# Altium PCB Power_Board_2.PcbDoc
Units mil, origin at the board's own origin, x right, y up, seen from the top; angles counter-clockwise.
Board outline 6295 x 3940 mil, 2 copper layers (Top Layer, Bottom Layer), stack 61.756 mil thick; 49 components, 183 nets, 278 pads, 4 vias.
Unrouted connection lines stored in the file: 76.
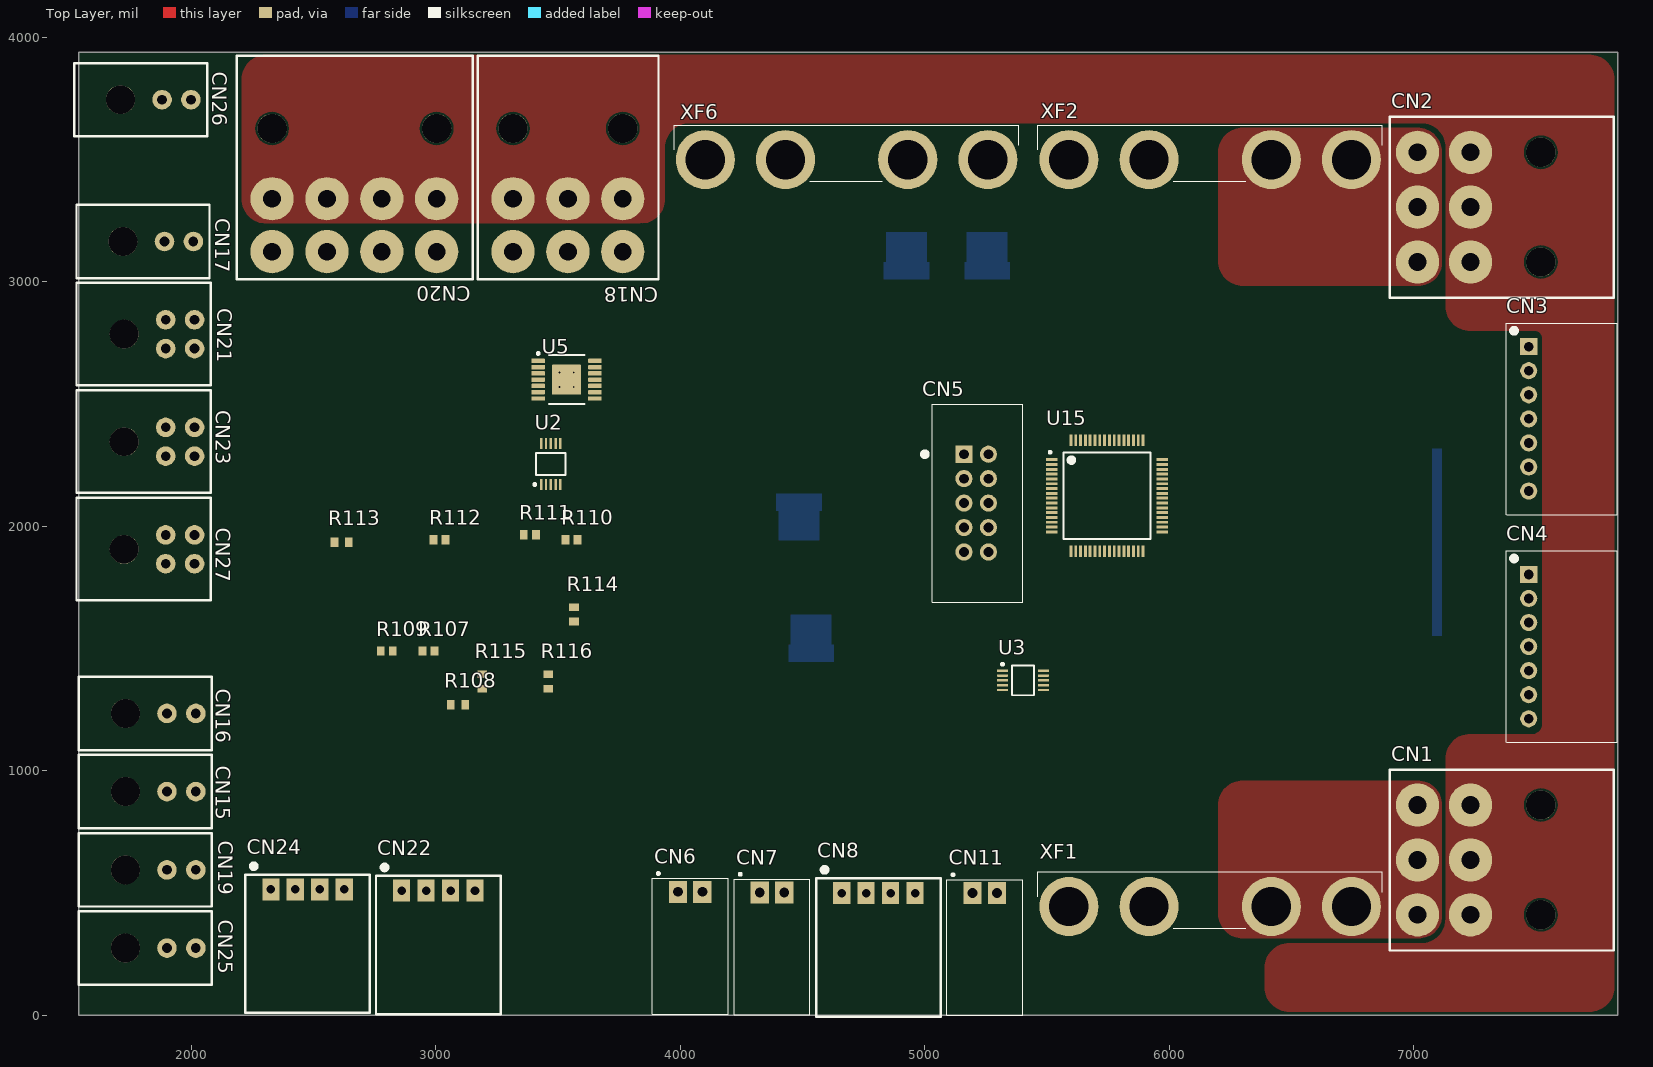
[diagram p0: Top Layer view]
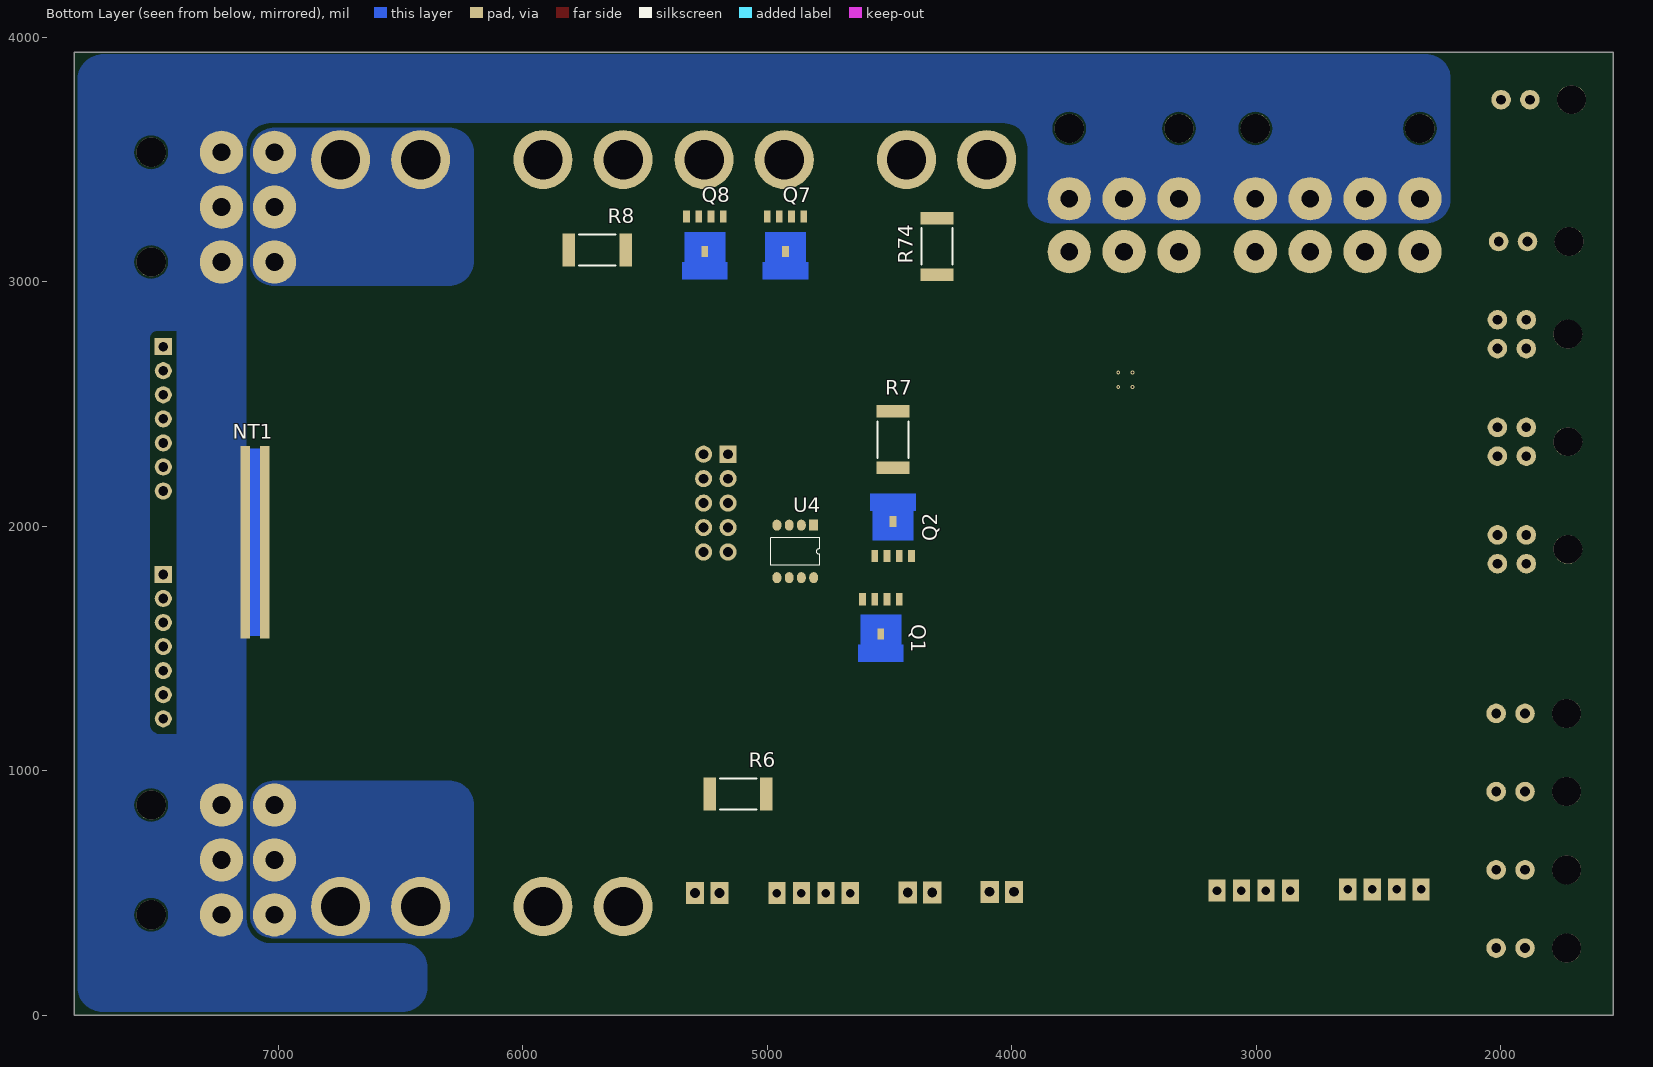
[diagram p1: Bottom Layer view, seen from below]

## Layer stack, top to bottom
Top Solder: solder mask 1, SM-001, Dk 4
Top Layer: signal copper 1.378
Dielectric 1: core 59, Core-043, Dk 4.3
Bottom Layer: signal copper 1.378
Bottom Solder: solder mask 1, SM-001, Dk 4

## Board outline
1540,0 7835,0 7835,3940 1540,3940

## Design rules (kind name [scope] priority, off if disabled: settings)
Clearance [All] p1: gap=8 ignorepadtopadclearanceinfootprint=TRUE
DiffPairsRouting [All] p1: maxlimit=10 minlimit=8 mostfreqgap=8 toplayer_minwidth=8 toplayer_maxwidth=15 toplayer_prefwidth=10 bottomlayer_minwidth=8 bottomlayer_maxwidth=15 bottomlayer_prefwidth=10 maxuncoupledlength=500
PolygonConnect Batt_30A [All vs IsNamedPolygon('Batt_30A')] p1: connectstyle=Direct reliefconductorwidth=10 reliefentries=4 polygonreliefangle="90 Angle" airgapwidth=10
PolygonConnect [All] p2: connectstyle=Relief reliefconductorwidth=10 reliefentries=4 polygonreliefangle="90 Angle" airgapwidth=10
RoutingVias [All] p1: holewidth=28 width=50 viastyle="Through Hole" minholewidth=15 minwidth=50 maxholewidth=28 maxwidth=50
SolderMaskExpansion [All] p1: expansion=4 istentingtop=FALSE
UnRoutedNet [All] p1: checkbadconnections=TRUE
Width [All] p1: maxlimit=10 minlimit=8 preferedwidth=10
28 further rules are at their usual default settings.

## Classes and differential pairs
net class ADC_Bat1_[6..1]: ADC_Bat1_1 ADC_Bat1_2 ADC_Bat1_3 ADC_Bat1_4 ADC_Bat1_5 ADC_Bat1_6
net class ADC_Bat0_[6..1]: ADC_Bat0_1 ADC_Bat0_2 ADC_Bat0_3 ADC_Bat0_4 ADC_Bat0_5 ADC_Bat0_6
component class U_Sensors: CN7
component class U_Reed_Switch: CN8 CN11 R107 R108 R109 R110 R111 R112 R113 R114 R115 R116
component class U_Micro: U15
component class U_External_Connections: CN18 CN20
component class U_Communications: CN6
component class U_Battery_Management: CN1 CN2 CN3 CN4 NT1 Q1 Q2 R6 R7 R8 U2 U3 U4 XF1 XF2
component class U_16V_VBatt_External: Q7 Q8 R74 XF6
component class U_5V_12V_External: U5
differential pair CAN: +CAN_P -CAN_N

## Components (designator, comment, footprint, x,y, rotation, side; value= is the part's Value field where it differs from the comment)
CN1 "76825-0006" 76825-0006-Footprint-1 7232,860 r270 top locked
CN2 "76825-0006" 76825-0006-Footprint-1 7232,3530 r270 top locked
CN3 "S7B-XH-A(LF)(SN)" S7B-XH-A(LF)(SN)-Footprint-1 7470,2735 r270 top locked
CN4 "S7B-XH-A(LF)(SN)" S7B-XH-A(LF)(SN)-Footprint-1 7470,1803.43 r270 top locked
CN5 "ST Debug Header 10-pin THT" "10-pin shrouded header THT" 5160,2295 r270 top
CN6 "1x2 Shrouded Right Angle" "2X1 Female Header" 3990,505 r90 top
CN7 "1x2 Shrouded Right Angle" "2X1 Female Header" 4325,501.97 r90 top
CN8 "Header, Male, 1x4, RA, Pitch 0.1\" (2.54mm)" "HEADER, MALE, SHROUDED, 4x1, PITCH 0.1\" (2.54mm), RA" 4660,500 r90 top
CN11 "1x2 Shrouded Right Angle" "2X1 Female Header" 5195,500 r90 top
CN15 "Header, Female, 1x2, Right Angle, Pitch 0.118\" (3.00mm), THT" "New footprint 1" 1900,915 r90 top
CN16 "Header, Female, 1x2, Right Angle, Pitch 0.118\" (3.00mm), THT" "New footprint 1" 1900,1235 r90 top
CN17 "Header, Female, 1x2, Right Angle, Pitch 0.118\" (3.00mm), THT" "New footprint 1" 1890,3165 r90 top
CN18 "76825-0006" 76825-0006-Footprint-1 3315.59,3340 r0 top locked
CN19 "Header, Female, 1x2, Right Angle, Pitch 0.118\" (3.00mm), THT" "New footprint 1" 1900,595 r90 top
CN20 "76825-0008" 76825-0008-Footprint-1 2330,3340 r0 top locked
CN21 "Header, Female, 2x2, RIght Angle, Pitch: 0.118\"  (3.00mm), THT" "2x2 Pitch 118mil connector" 1895,2727.01 r90 top
CN22 "Header, Male, 1x4, RA, Pitch 0.1\" (2.54mm)" "HEADER, MALE, SHROUDED, 4x1, PITCH 0.1\" (2.54mm), RA" 2860,510 r90 top
CN23 "Header, Female, 2x2, RIght Angle, Pitch: 0.118\"  (3.00mm), THT" "2x2 Pitch 118mil connector" 1895,2287.01 r90 top
CN24 "Header, Male, 1x4, RA, Pitch 0.1\" (2.54mm)" "HEADER, MALE, SHROUDED, 4x1, PITCH 0.1\" (2.54mm), RA" 2325,515 r90 top
CN25 "Header, Female, 1x2, Right Angle, Pitch 0.118\" (3.00mm), THT" "New footprint 1" 1900.08,275 r90 top
CN26 "Header, Female, 1x2, Right Angle, Pitch 0.118\" (3.00mm), THT" "New footprint 1" 1880,3745 r90 top
CN27 "Header, Female, 2x2, RIght Angle, Pitch: 0.118\"  (3.00mm), THT" "2x2 Pitch 118mil connector" 1895,1847.01 r90 top
NT1 "Net Tie, 20x3mm" NETTIE_20x3mm 7095,1935 r0 bottom net-tie
Q1 "MOSFET N-Channel, 40V, 100A, 272W" LFPAK-PowerSO8 4460,1701.73 r0 bottom
Q2 "MOSFET N-Channel, 40V, 100A, 272W" LFPAK-PowerSO8 4560,1878.27 r180 bottom
Q7 "MOSFET N-Channel, 40V, 100A, 272W" LFPAK-PowerSO8 4850,3266.73 r0 bottom
Q8 "MOSFET N-Channel, 40V, 100A, 272W" LFPAK-PowerSO8 5180,3266.73 r0 bottom
R6 "HCS2512FTL300" "RESC6332N(2512\")" 5118.86,905 r180 bottom
R7 "HCS2512FTL300" "RESC6332N(2512\")" 4485,2355 r90 bottom
R8 "HCS2512FTL300" "RESC6332N(2512\")" 5695,3130 r180 bottom
R74 "HCS2512FTL300" "RESC6332N(2512\")" 4305,3145 r90 bottom
R107 "CRCW0603-100KFKEA" RESC1609X50X30NL10T20 2969.53,1490 r0 top
R108 "RC0603FR-0710KL" RESC1608X55X25ML10T15 3090,1270 r0 top
R109 "CRCW0603-100KFKEA" RESC1609X50X30NL10T20 2799.53,1490 r0 top
R110 "CRCW0603-100KFKEA" RESC1609X50X30NL10T20 3554.53,1945 r0 top
R111 "CRCW0603-100KFKEA" RESC1609X50X30NL10T20 3384.53,1965.51 r0 top
R112 "CRCW0603-100KFKEA" RESC1609X50X30NL10T20 3014.53,1945 r0 top
R113 "RC0603FR-0710KL" RESC1608X55X25ML10T15 2614.53,1935 r0 top
R114 "RC0603FR-0710KL" RESC1608X55X25ML10T15 3565,1640 r90 top
R115 "RC0603FR-0710KL" RESC1608X55X25ML10T15 3190,1365 r90 top
R116 "RC0603FR-0710KL" RESC1608X55X25ML10T15 3460,1365 r90 top
U2 "INA226AIDGSR" DGS0010A_L 3470,2255 r90 top
U3 "INA226AIDGSR" DGS0010A_L 5401.34,1370 r0 top
U4 "MIC5014YM-TR" "SOC 8" 4810,2005 r270 bottom
U5 "LM3150MHX/NOPB" PWP0014A_N 3534.53,2600 r0 top
U15 "STM32F413RGT6" FP-LQFP64-5W-MFG 5745,2125 r0 top
XF1 "3555-2" 3555-2-Footprint-1 6745,445 r180 top locked
XF2 "3555-2" 3555-2-Footprint-1 6745,3500 r180 top locked
XF6 "3555-2" 3555-2-Footprint-1 5257.96,3500 r180 top locked

## Footprints (in the part's own frame and the unit in brackets; to place one, negate y for a bottom-side part, rotate by r counter-clockwise, add the part's x,y. Pads: shape width x height; smd on the part's side, far side on the other; paste and mask are expansions set on the pad)
"2X1 Female Header" [mil]
  rect 90x75 hole 40: 1(0,0) 2(0,-100)
  silkscreen extent -500,-205 80,105, body extent -495,-200 40,100, height 273
"2x2 Pitch 118mil connector" [mil]
  round 80 hole 40: 1(0,0) 2(117.99,0) 3(0,-118) 4(118,-118)
  round 118.11 hole 118.11: None(59.06,170.08)
  silkscreen extent -150,-184 270,365, body extent -141,-129 259,353, height 348
"10-pin shrouded header THT" [mil]
  rect 70x70 hole 40: 1(0,0)
  round 70 hole 40: 2(100,0) 3(200,0) 4(300,0) 5(400,0) 6(0,100) 7(100,100) 8(200,100) 9(300,100) 10(400,100)
  silkscreen extent -205,-170 605,240, body extent -198,-124 598,234, height 358
3555-2-Footprint-1 [mm]
  round 6.135 hole 4.09: 1(0,0) 2(8.33,0) 3(21.03,0) 4(29.36,0)
  silkscreen extent -3.22,-3.59 32.59,2.25, body extent -3.3,-8 32.64,2.29, height 9.92
76825-0006-Footprint-1 [mm]
  round 4.5 hole 1.85: 1(0,0) 2(5.7,0) 3(11.4,0) 4(0,-5.5) 5(5.7,-5.5) 6(11.4,-5.5)
  round 3.05 hole 3.05: None1(0,7.3) None2(11.4,7.3)
  silkscreen extent -3.68,-8.38 15.11,14.86, body extent -3.16,-6.03 14.6,15.93, height 14.54
76825-0008-Footprint-1 [mm]
  round 4.5 hole 1.85: 1(0,0) 2(5.7,0) 3(11.4,0) 4(17.1,0) 5(0,-5.5) 6(5.7,-5.5) 7(11.4,-5.5) 8(17.1,-5.5)
  round 3.05 hole 3.05: None1(0,7.3) None2(17.1,7.3)
  silkscreen extent -3.68,-8.38 20.83,14.86, body extent -3.18,-6.03 20.28,15.93, height 14.54
DGS0010A_L [mm] "SOP, 10-Leads, Body 3.1x3.1mm, Pitch 0.5mm, IPC High Density"
  rrect40% 1.15x0.25 smd: 1(-2.125,1) 2(-2.125,0.5) 3(-2.125,0) 4(-2.125,-0.5) 5(-2.125,-1) 6(2.125,-1) 7(2.125,-0.5) 8(2.125,0) 9(2.125,0.5) 10(2.125,1)
  silkscreen extent -2.25,-1.55 1.15,1.8, body extent -2.45,-1.5 2.45,1.5, height 0.94
FP-LQFP64-5W-MFG [mm]
  rect 1.2x0.3 smd paste+0 mask+0: 1(-5.75,3.75) 2(-5.75,3.25) 3(-5.75,2.75) 4(-5.75,2.25) 5(-5.75,1.75) 6(-5.75,1.25) 7(-5.75,0.75) 8(-5.75,0.25) 9(-5.75,-0.25) 10(-5.75,-0.75) 11(-5.75,-1.25) 12(-5.75,-1.75) 13(-5.75,-2.25) 14(-5.75,-2.75) 15(-5.75,-3.25) 16(-5.75,-3.75) 33(5.75,-3.75) 34(5.75,-3.25) 35(5.75,-2.75) 36(5.75,-2.25) 37(5.75,-1.75) 38(5.75,-1.25) 39(5.75,-0.75) 40(5.75,-0.25) 41(5.75,0.25) 42(5.75,0.75) 43(5.75,1.25) 44(5.75,1.75) 45(5.75,2.25) 46(5.75,2.75) 47(5.75,3.25) 48(5.75,3.75)
  rect 0.3x1.2 smd paste+0 mask+0: 17(-3.75,-5.75) 18(-3.25,-5.75) 19(-2.75,-5.75) 20(-2.25,-5.75) 21(-1.75,-5.75) 22(-1.25,-5.75) 23(-0.75,-5.75) 24(-0.25,-5.75) 25(0.25,-5.75) 26(0.75,-5.75) 27(1.25,-5.75) 28(1.75,-5.75) 29(2.25,-5.75) 30(2.75,-5.75) 31(3.25,-5.75) 32(3.75,-5.75) 49(3.75,5.75) 50(3.25,5.75) 51(2.75,5.75) 52(2.25,5.75) 53(1.75,5.75) 54(1.25,5.75) 55(0.75,5.75) 56(0.25,5.75) 57(-0.25,5.75) 58(-0.75,5.75) 59(-1.25,5.75) 60(-1.75,5.75) 61(-2.25,5.75) 62(-2.75,5.75) 63(-3.25,5.75) 64(-3.75,5.75)
  silkscreen extent -6.02,-4.5 4.5,4.65, body extent -6.45,-6.45 6.45,6.45, height 0.25
"HEADER, MALE, SHROUDED, 4x1, PITCH 0.1\" (2.54mm), RA" [mil]
  rect 90x70 hole 35: 1(0,0) 2(0,-100) 3(0,-200) 4(0,-300)
  silkscreen extent -505,-405 105,105, body extent -495,-397 40,97, height 270
LFPAK-PowerSO8 [mm] "LFPAK-PowerSO8"
  rect 0.7x1.25 smd: 1(0,0) 2(1.27,0) 3(2.54,0) 4(3.81,0)
  rect 0.7x1.15 smd: 5(1.905,3.6)
  Top Layer region: -0.195,1.625 4.005,1.625 4.005,4.725 4.255,4.725 4.255,6.5 3.74,6.5 3.1,6.5 1.9,6.5 -0.445,6.5 -0.445,4.725 -0.195,4.725
  body extent -0.59,-0.4 4.41,6.2, height 1.09
NETTIE_20x3mm [mm]
  rect 1x20 smd mask+0.102: 1(-1,0) 2(1,0)
  Top Layer region: -0.5,9.75 0.5,9.75 0.5,-9.75 -0.5,-9.75
"New footprint 1" [mil]
  round 80 hole 40: 1(0,0) 2(0,-118)
  round 118 hole 118 unplated: None(0,170.08)
  silkscreen extent -150,-184 150,360, body extent -140,-131 141,351, height 338
PWP0014A_N [mm] "SOP, 14-Leads, Body 5.1x4.5mm, Pitch 0.65mm, Thermal Pad 3x3.1mm, IPC Medium Density"
  rrect22% 1.4x0.45 smd: 1(-2.95,1.95) 2(-2.95,1.3) 3(-2.95,0.65) 4(-2.95,0) 5(-2.95,-0.65) 6(-2.95,-1.3) 7(-2.95,-1.95) 8(2.95,-1.95) 9(2.95,-1.3) 10(2.95,-0.65) 11(2.95,0) 12(2.95,0.65) 13(2.95,1.3) 14(2.95,1.95)
  rrect3% 3x3.1 smd: 15(0,0)
  silkscreen extent -3.07,-2.55 1.85,2.85, body extent -3.21,-2.5 3.21,2.5, height 1
RESC1608X55X25ML10T15 [mm] "Chip Resistor, 2-Leads, Body 1.60x0.80mm, IPC Low Density"
  rect 0.8x1 smd: 1(-0.75,0) 2(0.75,0)
  body extent -0.85,-0.45 0.85,0.45, height 0.55
RESC1609X50X30NL10T20 [mm] "Chip Resistor, 2-Leads, Body 1.55x0.85mm, IPC Medium Density"
  rect 0.8x0.95 smd: 1(-0.625,0) 2(0.625,0)
  body extent -0.82,-0.48 0.82,0.48, height 0.5
"RESC6332N(2512\")" [mm] "Chip Resistor, Body 6.3x3.2mm (2512\"), IPC Medium Density"
  rect 1.3x3.4 smd: 1(-2.95,0) 2(2.95,0)
  silkscreen extent -1.9,-1.6 1.9,1.6, body extent -3.2,-1.6 3.2,1.6, height 0.6
S7B-XH-A(LF)(SN)-Footprint-1 [mil]
  rect 70x70 hole 40: 1(0,0)
  round 70 hole 40: 2(98.43,0) 3(196.85,0) 4(295.28,0) 5(393.7,0) 6(492.13,0) 7(590.55,0)
  silkscreen extent -96,-92 687,363, body extent -96,-91 688,361, height 242
"SOC 8" [mm]
  rect 1.14x0.91 smd: 1(0,0)
  oval 1.14x0.91 smd: 2(0,-1.27) 3(0,-2.54) 4(0,-3.81) 5(5.46,-3.81) 6(5.46,-2.54) 7(5.46,-1.27) 8(5.46,0)
  silkscreen extent 1.3,-4.45 4.16,0.63, body extent -0.33,-4.32 5.67,0.58, height 1.75

## Part data
CN1 CN2 CN18: library part CMP-00049-2, "CONNECTOR, HEADER, 6POS, 2ROW, 5.7MM; Product Range:Mega-Fit 76825 Series; Contact Termination Type:Through Hole; Gender:Header; No. of Contacts:6; Pitch Spacing:5.7mm; Contact Plating:Tin Plated Contacts; Contact Material:Copper", Color=Black, Contact Material=Copper, Contact Plating=Tin, Gender=Male, Mount="Through Hole", Number of Circuits=6, Number of Contacts=6, Number of Pins=6, Number of Rows=2, Orientation="Right Angle", Pitch=5.7mm, REACH SVHC=Unknown, Termination="Through Hole"
CN3 CN4: library part CMP-00017-1, "CONN HEADER XH SIDE 7POS 2.5MM", Color=Natural, Contact Resistance=10mR, Current Rating=3A, Flammability Rating="UL94 V-0", Insulation Resistance=1GR, Max Operating Temperature=85°C, Min Operating Temperature=-25°C, Package Quantity=250, Voltage Rating=250V, Connector Type="Header,Male Pin", Contact Material=Brass, Contact Plating=Tin,Lead, Contact Shape=Square, Fastening Type=Detent, Gender=Male, Insulation Color=Natural, Insulation Material=Nylon, Lead Free="Lead Free", Lead Pitch=2.5mm, Mount="Through Hole", Number of Contacts=7, Number of Positions=7, Number of Rows=1, Orientation="Right Angle", Packaging=Bulk, Pitch=2.5mm, REACH SVHC="No SVHC", Termination=Solder, Voltage Rating (AC)=250V, Wire/Cable Gauge=22AWG
CN5: library part CMP-00011-6, "CONN HEADER VERT 10POS 2.54MM", Color=Black, Package Quantity=1, Connector Type="Male Pin", Contact Plating=Gold, Lead Free="Lead Free", Mount="Through Hole", Number of Positions=10, Number of Rows=2, Packaging=Tray, Pitch=0.1inch, Row Spacing=0.1inch, Termination=Solder
CN6 CN7 CN11: library part CMP-00010-2, "02 MTE HDR SRRA LATCH", Color=Black, Contact Current Rating=3A, Contact Resistance=15mR, Flammability Rating="UL94 V-0", Insulation Resistance=5GR, Max Operating Temperature=105°C, Min Operating Temperature=-65°C, Package Quantity=68, Approvals=CSA, Backwall/Post Interruptions="No (Without)", Connector Type=Plug,Header,Pin, Contact Gender=Male, Contact Material=Brass, Contact Mating Length=0.23inch, Contact Plating=Gold,Tin,Matte, Contact Retention="Yes (With)", Contact Shape=Square, Current Rating=3A, Depth=13.59mm, ELV=Compliant, Gender=Male, Height=13.59mm, Housing Color=Black, Housing Material=Thermoplastic, Lead Free="Lead Free", Length=7.62mm, Mating Alignment="Yes (With)", Mating Retention="Yes (With)", Mount="Through Hole", Number of Contacts=2, Number of Positions=2, Number of Rows=1, Orientation="Right Angle", Packaging=Rail/Tube, PCB Mount Alignment="No (Without)", PCB Mount Retention=Without, PCB Mounting Orientation="Right Angle", PCB Thickness=0.062inch, Pitch=2.54mm, REACH SVHC=Unknown, Row Spacing=0.1inch, Strain Relief="No (Without)", Tail Length=3.3mm, Termination=Crimp
CN8 CN22 CN24: library part CMP-005-0029-2, "Connector Header Through Hole, Right Angle 4 position 0.100\" (2.54mm)", Component Type=Standard, Created By="Miguel Manguerra", Created On=2020-05-20, Design Item ID="Header, Male, 1x4, RA, Pitch 0.1\" (2.54mm)", Pin Count=4, Source=AUVic_Schematic_Library_Connectors.SchLib
CN15 CN16 CN17 CN19 CN25 CN26: library part CMP-00001-4, "Connector Header Through Hole, Right Angle 2 position", Case/Package=SMC, Color=Black, Contact Resistance=10mR, Current Rating=5A, Flammability Rating="UL94 V-0", Insulation Resistance=1GR, Max Operating Temperature=105°C, Max Voltage Rating (DC)=250.25kV, Min Operating Temperature=-40°C, Package Quantity=3168, Voltage Rating=600V, Voltage Rating (DC)=250V, Contact Material=Brass, Contact Plating=Gold, Depth=12.2mm, Diameter=3mm, Gender=Male, Glow Wire Compliant=Compliant, Halogen Free="Low Halogen", Height=8.77mm, Housing Color=Black, Housing Material=Thermoplastic, Lead Free="Contains Lead", Length=7.15mm, Max Current Rating=5A, Mount="Through Hole", Number of Circuits=2, Number of Contacts=2, Number of Positions=2, Number of Rows=2, Orientation="Right Angle", Packaging=Tray, Pitch=3mm, Radiation Hardening=No, Termination=Solder
CN20: library part CMP-00051-3, "MOLEX         76825-0008.             CONNECTOR, HEADER, 8POS, 2ROW, 5.7MM", Color=Black, Contact Material=Copper, Contact Plating=Tin, Gender=Male, Mount="Through Hole", Number of Circuits=8, Number of Contacts=8, Number of Pins=8, Number of Rows=2, Orientation="Right Angle", Pitch=5.7mm, REACH SVHC=Unknown, Termination="Through Hole"
CN21 CN23 CN27: library part CMP-005-0021-4, "Connector Header Through Hole, Right Angle 4 position 0.118\" (3.00mm)", Component Type=Standard, Created By="Poorna Chander Kalidas", Date Published=2020-05-16, Design Item ID="Header, Female, 2x2, RIght Angle, Pitch: 0.118\"  (3.00mm), THT", Pin Count=4, Publisher=AUVic, Source=AUVic_Schematic_Library_Connectors.SchLib
NT1: library part CMP-053-0007-2, Component Type="Net Tie", Created By="Ashwin Sira", Date Created=2016-06-17, Design Item ID="Net Tie, 20x3mm", Pin Count=2, Publisher=AUVic, Size=20mmx3mm, Source=AUVic_Integrated_Library_Virtual_Components.SchLib
Q1 Q2 Q7 Q8: library part CMP-052-0019-1, "MOSFET N-Channel, 40V, 100A, 272W, Enh-Mode", Component Type=Standard, Created By="Ashwin Sira", Design Item ID="MOSFET N-Channel, 40V, 100A, 272W", Latest_Revision_By="Ashwin Sira", Latest_Revision_Date=2016_04_26, Latest_Revision_Note="Attached footprint", MFG="NXP Semiconductors", MFG#=PSMN1R8-40YLC,115, Pin Count=5, Publisher=AUVic, Reviewed_By="Ashwin Sira", Reviewed_Date=2016_04_26, Source=AUVic_Schematic_Library_Transistors.SchLib
R6 R7 R8 R74: library part CMP-047-0000-2, "300 µOhms ±1% 3W Chip Resistor 2512 (6432 Metric) Automotive AEC-Q200, Current Sense, Moisture Resistant Metal Element", Case Code (Imperial)=2512, Case Code (Metric)=6432, Max Operating Temperature=170°C, Max Power Dissipation=3W, Min Operating Temperature=-55°C, Package Quantity=4000, Resistance=0.3mR, Temperature Coefficient=150ppm/°C, Tolerance=1%, Case/Package=2512, Composition="Metal Element", Features="Moisture Resistant,Automotive AEC-Q200", Height=0.038inch, Length=0.256inch, Number of Terminations=2, Packaging="Cut Tape", Width=0.128inch
R107 R109 R110 R111 R112: library part CMP-00036-1, "Resistor; Thick Film; 100 Kilohms; 0.1 W; 1%; SMT; 0603; TCR 37 ppm/DegC; Tape and Reel", Case Code (Imperial)=0603, Case Code (Metric)=1608, Max Operating Temperature=155°C, Max Power Dissipation=100mW, Min Operating Temperature=-55°C, Package Quantity=10, Resistance=100kR, Temperature Coefficient=100ppm/°C, Tolerance=1%, Voltage Rating=75V, Case/Package=0603, Composition="Thick Film", Contact Plating=Tin,Lead, Depth=0.85mm, Features="Automotive AEC-Q200", Height=0.45mm, Lead Free="Lead Free", Length=1.55mm, Military Standard=Not, Number of Pins=2, Number of Terminations=2, Packaging="Tape and Reel", Power Rating=100mW, Radiation Hardening=No, REACH SVHC=Unknown, Termination=SMD/SMT, Voltage Rating (DC)=75V, Weight=7.1E-05oz, Width=0.033inch
R108 R113 R114 R115 R116: library part CMP-00037-1, "Res General Purpose Thick Film 0603 10K Ohm 1% 1/10W ±100ppm/°C Molded SMD Paper T/R", Case Code (Imperial)=0603, Case Code (Metric)=1608, Max Operating Temperature=155°C, Min Operating Temperature=-55°C, Power Rating=100mW, Resistance=10kR, Temperature Coefficient=100ppm/°C, Tolerance=1%, Voltage Rating=75V, Voltage Rating (DC)=50V, Case/Package=0603, Composition="Thick Film", Depth=0.8mm, Height=0.45mm, Lead Free="Lead Free", Lead Pitch=0.3mm, Length=1.6mm, Military Standard=Not, Number of Pins=2, Packaging="Tape and Reel", REACH SVHC="No SVHC", Termination=SMD/SMT, Weight=7.1E-05oz, Width=0.8mm
U2 U3: library part CMP-00032-1, "Bi Directional Current and Power Monitor 10-Pin VSSOP T/R", Case/Package=VSSOP, Input Bias Current=10uA, Input Offset Voltage (Vos)=2.5uV, Max Operating Temperature=125°C, Max Supply Voltage=5.5V, Min Operating Temperature=-40°C, Min Supply Voltage=2.7V, Nominal Supply Current=330uA, Output Current=10mA, Package Quantity=1, Accuracy=0.02%, Common Mode Rejection Ratio=140dB, Contact Plating=Gold, Lead Free="Lead Free", Mount="Surface Mount", Number of Pins=10, Packaging="Tape and Reel", Radiation Hardening=No, REACH SVHC="No SVHC"
U4: library part CMP-028-0000-2, "High-Side or Low-Side Gate Driver IC Non-Inverting 8-SOIC", Case/Package=SOIC, Max Operating Temperature=85°C, Max Output Current=10mA, Max Supply Voltage=30V, Min Operating Temperature=-40°C, Min Supply Voltage=2.75V, Package Quantity=2500, Channel Type=Single, Height=1.48mm, Lead Free="Lead Free", Length=4.93mm, Mount="Surface Mount", Number of Drivers=1, Number of Outputs=1, Number of Pins=8, Packaging="Tape and Reel", Turn-Off Delay Time=30us, Turn-On Delay Time=8ms, Width=3.94mm
U5: library part CMP-00012-1, "IC REG CTRLR BUCK 14TSSOP", Case/Package=TSSOP, Max Frequency=1MHz, Max Operating Temperature=125°C, Max Supply Voltage=42V, Min Operating Temperature=-40°C, Min Supply Voltage=6V, Output Current=12A, Output Voltage=600mV, Package Quantity=2500, Quiescent Current=3.5mA, Contact Plating=Tin,Matte, Duty Cycle=95%, Features=UVLO, Lead Free="Lead Free", Max Duty Cycle=96%, Mount="Surface Mount", Number of Outputs=1, Number of Pins=14, Packaging="Tape and Reel", Radiation Hardening=No, REACH SVHC="No SVHC", Switching Frequency=1MHz
U15: library part CMP-00006-1, "STMICROELECTRONICS - STM32F413RGT6 - MCU, ARM CORTEX-M4, 100MHZ, LQFP-64", Case/Package=LQFP, Frequency=100MHz, Max Operating Temperature=85°C, Min Operating Temperature=-40°C, Core Architecture=ARM, Interface=I2C,SPI,USB,IrDA,MMC,SDIO,UART,USART, Memory Size=1MB, Memory Type=FLASH, Number of I/Os=50, Oscillator Type=Internal, Packaging=Tray, Peripherals="Brown-out Detect/Reset,POR,PWM,WDT,DMA,LCD"
XF1 XF2 XF6: library part CMP-00058-1, "FUSE HOLDER MAXI AUTO BLADE PC", Color=Black, Current Rating=40A, Max Operating Temperature=145°C, Min Operating Temperature=-50°C, Package Quantity=100, Voltage=500V, Approvals=UL, Body Material=Nylon,Glass, Contact Material=Copper,Tin, Contact Plating=Nickel, Depth=5.9mm, Fuse Current=40A, Fuse Type=Automotive, Illumination Type=Illuminated, Lead Free="Lead Free", Length=35.8mm, Material=Copper,Brass,Tin,Nylon, Mount=Vertical,PCB, Number of Circuits=1, Number of Poles=1, Orientation=Vertical, REACH SVHC="No SVHC", Termination="PC Pin", Voltage Rating (AC)=500V

## Via types
v1: diameter 15.75, hole 7.87, Top Layer to Bottom Layer, 4 vias

## Nets (pads, with @x,y where several pads share a name; then routed paths per layer and width w, separated by ;. In a path a pad name is that pad's centre, name@x,y a point inside that pad or via, vN(x,y) a via of type N, cw(c..) or ccw(c..) an arc to the next point about the centre after c; other vN are vias at no path point)
3V3: CN8.1 R111.2 U2.2 U2.6 U3.6 U15.1 U15.19 U15.32 U15.48 U15.64
5V_DEBUG: 
5V_EXT: CN18.6 CN20.8
5V_EXT_RAW: 
5V_FB: U5.4
5V_INT: 
12V_EXT: 
12V_EXT_RAW: 
12V_FB: 
16V_EXT: 
16V_EXT_RAW: 
ADC_Bat0_1: U15.14
ADC_Bat0_2: U15.15
ADC_Bat0_3: U15.16
ADC_Bat0_4: U15.17
ADC_Bat0_5: U15.20
ADC_Bat0_6: U15.21
ADC_Bat1_1: U15.22
ADC_Bat1_2: U15.23
ADC_Bat1_3: U15.26
ADC_Bat1_4: U15.27
ADC_Bat1_5: U15.8
ADC_Bat1_6: U15.9
Battery0: R6.1 XF1.3 XF1.4
Battery0_raw: CN1.4 CN1.5 CN1.6 XF1.1 XF1.2
Battery1: R8.2 XF2.3 XF2.4
Battery1_raw: CN2.4 CN2.5 CN2.6 XF2.1 XF2.2
BLUE: U15.4
BOOT0: U15.60
CAN_N: CN6.2
CAN_P: CN6.1
CAN_RXD: U15.61
CAN_TXD: U15.62
CLK: U15.50
EXT_Pressure_Raw: 
GND: CN7.1 NT1.1 R112.1 R113.2 U2.1 U2.7 U3.1 U3.7 U4.4 U5.5 U5.9 U5.15 U15.12 U15.18 U15.31 U15.47 U15.63
  other v1: 3505,2570.47 3564.06,2570.47 3505,2629.53 3564.06,2629.53
GREEN: U15.3
I2C_SCL: U2.5 U3.5 U15.36
I2C_SDA: U2.4 U3.2 U3.4 U15.35
Motor_PWR: Q7.5 Q8.5 R7.2 R8.1 U3.8
NetC2_1: 
NetC2_2: 
NetC4_1: U2.9
NetC4_2: U2.10
NetC5_1: U3.10
NetC5_2: U3.9
NetC11_1: U5.10
NetC11_2: U5.12
NetC12_2: U5.3
NetC15_2: 
NetC16_1: 
NetC16_2: 
NetC17_1: U5.6
NetC21_2: U5.1
NetC28_1: 
NetC28_2: 
NetC29_2: 
NetC30_2: 
NetC32_1: 
NetC32_2: 
NetC33_1: 
NetC37_2: 
NetC39_2: 
NetC42_1: 
NetC42_2: 
NetC45_2: 
NetC51_1: 
NetC51_2: 
NetC54_1: 
NetC54_2: 
NetC58_2: 
NetC63_2: U15.30
NetC77_1: 
NetC78_1: 
NetC78_2: 
NetC79_1: 
NetC79_2: 
NetC80_2: 
NetC83_1: R107.1 R108.1
NetC84_1: R109.1 R112.2
NetC85_1: R114.1
NetC86_1: R115.1
NetC87_1: R116.1
NetCN3_2: CN3.2
NetCN3_3: CN3.3
NetCN3_4: CN3.4
NetCN3_5: CN3.5
NetCN3_6: CN3.6
NetCN3_7: CN3.7
NetCN4_2: CN4.2
NetCN4_3: CN4.3
NetCN4_4: CN4.4
NetCN4_5: CN4.5
NetCN4_6: CN4.6
NetCN4_7: CN4.7
NetCN8_2: CN8.2 R116.2
NetCN8_3: CN8.3 R115.2
NetCN8_4: CN8.4 R114.2
NetD1_2: 
NetD2_2: 
NetD3_2: 
NetD4_2: 
NetD5_2: 
NetD6_2: 
NetD7_2: 
NetD9_K: 
NetD11_2: 
NetD12_2: 
NetD13_2: 
NetD14_2: 
NetD15_2: 
NetD16_2: 
NetD18_A: U15.10
NetD20_2: 
NetQ1_1: Q1.1 Q1.2 Q1.3 Q2.1 Q2.2 Q2.3 U4.3
NetQ1_4: Q1.4
NetQ2_4: Q2.4
NetQ2_5: Q2.5 R7.1
NetQ3_4: U5.11
NetQ4_4: U5.13
NetQ5_4: 
NetQ6_4: 
NetQ7_1: Q7.1 Q7.2 Q7.3 Q8.1 Q8.2 Q8.3 XF6.1 XF6.2
NetQ7_4: Q7.4
NetQ9_1: 
NetQ9_3: U15.11
NetQ10_1: R110.2
NetQ10_3: R113.1
NetQ11_3: R110.1
NetQ12_3: R111.1 U15.56
NetQ13_3: U15.57
NetQ14_3: U15.58
NetQ15_3: U15.59
NetR1_1: U15.24
NetR25_1: U4.5
NetR27_1: U4.2 U15.41
NetR28_2: U3.3 U15.43
NetR29_2: U2.3 U15.42
NetR43_1: 
NetR46_2: U5.7
NetR47_1: U5.8
NetR53_2: U15.37
NetR54_1: 
NetR57_1: 
NetR58_1: 
NetR64_2: U15.38
NetR65_1: U15.40
NetR66_2: 
NetR68_1: 
NetR71_2: 
NetR73_2: U15.39
NetR74_2: R74.2 XF6.3
NetR78_2: 
NetR80_1: 
NetR81_2: U15.25
NetR98_1: U15.29
NetR99_1: 
NetR101_1: 
NetR108_2: R108.2 U15.28
NetU15_2: U15.2
NetU15_51: U15.51
NetU15_52: U15.52
NetU15_53: U15.53
NRST: U15.7
OSC_IN: U15.5
OSC_OUT: U15.6
PGND: CN1.1 CN1.2 CN1.3 CN2.1 CN2.2 CN2.3 CN18.1 CN18.2 CN18.3 CN20.1 CN20.2 CN20.3 CN20.4 NT1.2 U5.14
PROBE: CN7.2
RED: U15.54
"Reed Switch Line": CN11.2 R107.2 R109.2
RS232_RX: 
RS232_TX: 
SWCLK: U15.49
SWDIO: U15.46
SWO: U15.55
System_PWR: Q1.5 R6.2 U2.8 U5.2
UART_RX: U15.33
UART_RX_DEBUG: U15.44
UART_TX: U15.34
UART_TX_DEBUG: U15.45
VBatt_EXT: CN18.4 CN18.5 CN20.5 CN20.6 CN20.7 R74.1
Vbatt_INT: CN11.1 U4.1
VDDA/VREF+: U15.13
pads on no net: CN1.None1 CN1.None2 CN2.None1 CN2.None2 CN3.1 CN4.1 CN5.1 CN5.2 CN5.3 CN5.4 CN5.5 CN5.6 CN5.7 CN5.8 CN5.9 CN5.10 CN15.1 CN15.2 CN15.None CN16.1 CN16.2 CN16.None CN17.1 CN17.2 CN17.None CN18.None1 CN18.None2 CN19.1 CN19.2 CN19.None CN20.None1 CN20.None2 CN21.1 CN21.2 CN21.3 CN21.4 CN21.None CN22.1 CN22.2 CN22.3 CN22.4 CN23.1 CN23.2 CN23.3 CN23.4 CN23.None CN24.1 CN24.2 CN24.3 CN24.4 CN25.1 CN25.2 CN25.None CN26.1 CN26.2 CN26.None CN27.1 CN27.2 CN27.3 CN27.4 CN27.None Q8.4 U4.6 U4.7 U4.8 XF6.4

## Polygon pours and split planes (outlines as drawn)
no net on Mechanical 1 (solid): 7105,3530
no net on Mechanical 1 (solid): 6680,3885
no net on Mechanical 1 (solid): 7020.46,4520
PGND on Top Layer "Batt_30A" (solid, pour order 16): 7130,2900 ccw(c7230,2900) 7230,2800 7495,2800 cw(c7495,2770) 7525,2770 7525,1190 cw(c7485,1190) 7485,1150 7230,1150 ccw(c7230,1050) 7130,1050 7130,850 ccw(c7230,850) 7230,750 7820,750 7820,3215 ccw(c7745,3215) 7745,3290 7230,3290 ccw(c7230,3190) 7130,3190
PGND on Top Layer "Batt_30A" (solid, pour order 12): 7130,860 cw(c7230,860) 7230,960 7720,960 cw(c7720,860) 7820,860 7820,115 cw(c7720,115) 7720,15 6490,15 cw(c6490,115) 6390,115 6390,195 cw(c6490,195) 6490,295 7030,295 ccw(c7030,395) 7130,395
no net on Top Layer "NONET_L01_P007" (solid, pour order 7): 7815,3095
PGND on Top Layer "Batt_30A" (solid, pour order 6): 7131.45,3548.77 ccw(c7031.45,3548.77) 7031.45,3648.77 4036.45,3648.77 ccw(c4036.45,3548.77) 3936.45,3548.77 3936.45,3338.77 cw(c3836.45,3338.77) 3836.45,3238.77 2306.45,3238.77 cw(c2306.45,3338.77) 2206.45,3338.77 2206.45,3828.77 cw(c2306.45,3828.77) 2306.45,3928.77 7716.45,3928.77 cw(c7718.84,3827.61) 7820,3830 7820,3055 cw(c7717.61,3056.16) 7716.45,2953.77 7231.45,2953.77 cw(c7231.45,3053.77) 7131.45,3053.77
Battery0_raw on Top Layer "Batt_30A" (solid, pour order 3): 7115,860 ccw(c7015,860) 7015,960 6300,960 ccw(c6300,860) 6200,860 6200,415 ccw(c6300,415) 6300,315 7020,315 ccw(c7020,410) 7115,410
Battery1_raw on Top Layer "Batt_30A" (solid, pour order 2): 7115,3530 ccw(c7015,3530) 7015,3630 6300,3630 ccw(c6300,3530) 6200,3530 6200,3085 ccw(c6300,3085) 6300,2985 7020,2985 ccw(c7020,3080) 7115,3080
no net on Bottom Layer "NONET_L02_P019" (solid, pour order 19): 7415,1180
PGND on Bottom Layer "Batt_30A" (solid, pour order 18): 7130,3010 7130,985 7415,985 7415,3010
PGND on Bottom Layer "Batt_30A" (solid, pour order 17): 7130,2900 ccw(c7230,2900) 7230,2800 7495,2800 cw(c7495,2770) 7525,2770 7525,1190 cw(c7485,1190) 7485,1150 7230,1150 ccw(c7230,1050) 7130,1050 7130,850 ccw(c7230,850) 7230,750 7820,750 7820,3215 ccw(c7745,3215) 7745,3290 7230,3290 ccw(c7230,3190) 7130,3190
Battery1_raw on Bottom Layer "Batt_30A" (solid, pour order 0): 7115,3530 ccw(c7015,3530) 7015,3630 6300,3630 ccw(c6300,3530) 6200,3530 6200,3085 ccw(c6300,3085) 6300,2985 7020,2985 ccw(c7020,3080) 7115,3080
PGND on Bottom Layer "Batt_30A" (solid, pour order 11): 7130,860 cw(c7230,860) 7230,960 7720,960 cw(c7720,860) 7820,860 7820,115 cw(c7720,115) 7720,15 6490,15 cw(c6490,115) 6390,115 6390,195 cw(c6490,195) 6490,295 7030,295 ccw(c7030,395) 7130,395
PGND on Bottom Layer "Batt_30A" (solid, pour order 5): 7130,3550 ccw(c7030,3550) 7030,3650 4035,3650 ccw(c4035,3550) 3935,3550 3935,3340 cw(c3835,3340) 3835,3240 2305,3240 cw(c2305,3340) 2205,3340 2205,3830 cw(c2305,3830) 2305,3930 7715,3930 cw(c7717.5,3827.5) 7820,3830 7820,3055 cw(c7717.5,3057.5) 7715,2955 7230,2955 cw(c7230,3055) 7130,3055
Battery0_raw on Bottom Layer "Batt_30A" (solid, pour order 4): 7115,860 ccw(c7015,860) 7015,960 6300,960 ccw(c6300,860) 6200,860 6200,415 ccw(c6300,415) 6300,315 7020,315 ccw(c7020,410) 7115,410